# Altium PCB filter-6.PcbDoc
Units mil, origin at the board's own origin, x right, y up, seen from the top; angles counter-clockwise.
Board outline 1975 x 1380 mil, 2 copper layers (Top Layer, Bottom Layer); 5 components, 3 nets, 10 pads, 0 vias.
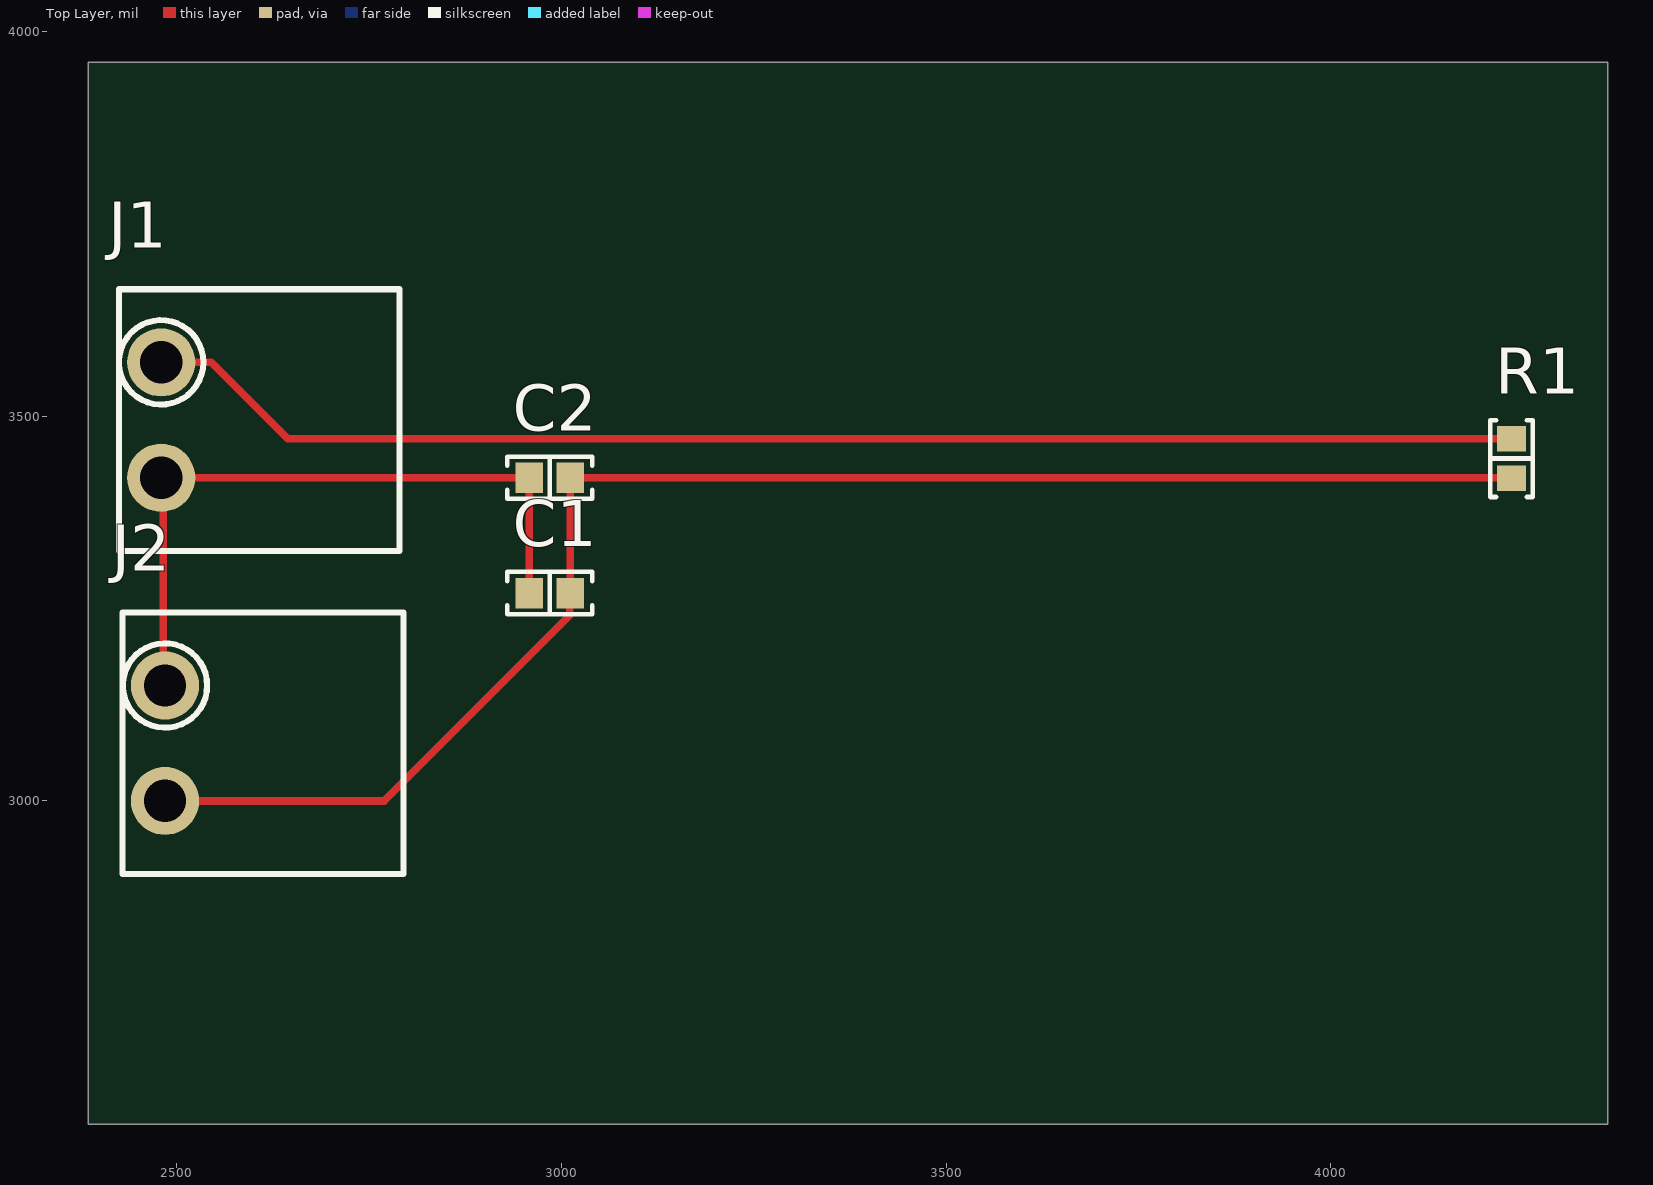
[diagram p0: Top Layer view]
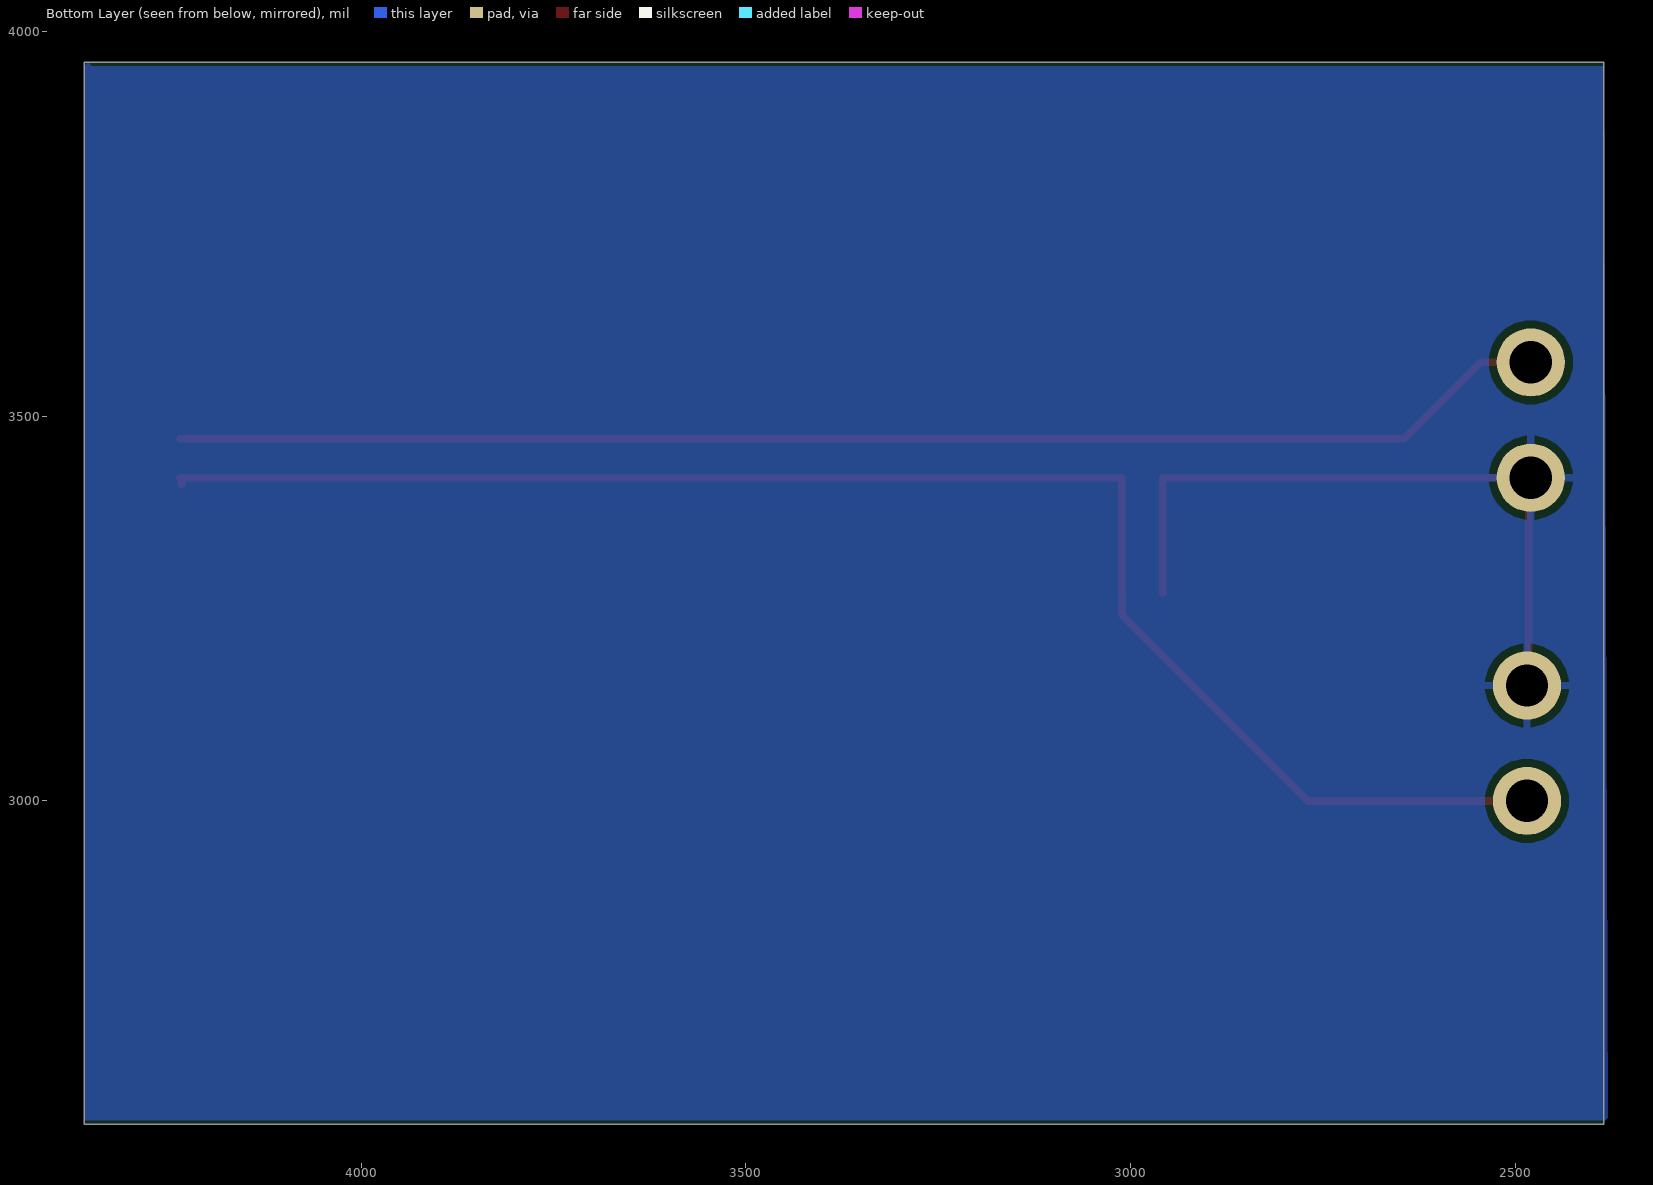
[diagram p1: Bottom Layer view, seen from below]
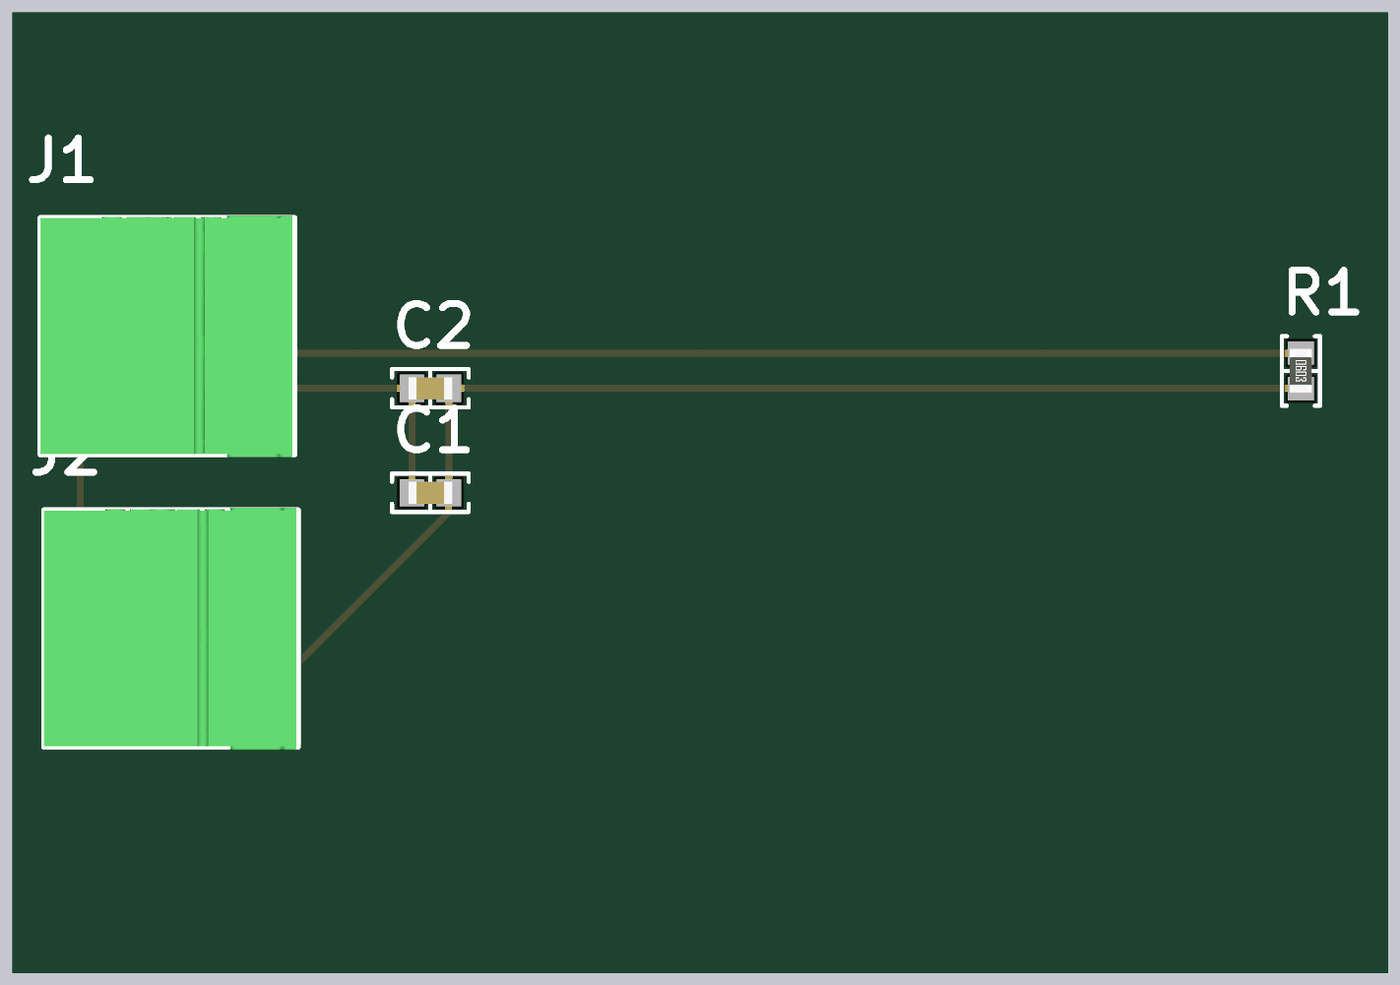
[diagram p2: 3D render of the assembled board from above, using the file's embedded part models]

## Layer stack, top to bottom
Top Solder: solder mask 0.4, Solder Resist, Dk 3.5
Top Layer: signal copper 1.4
Dielectric 1: dielectric 12.6, FR-4, Dk 4.8
Bottom Layer: signal copper 1.4
Bottom Solder: solder mask 0.4, Solder Resist, Dk 3.5

## Board outline
2385,2580 4360,2580 4360,3960 2385,3960

## Design rules (kind name [scope] priority, off if disabled: settings)
Clearance [All] p1: gap=10 ignorepadtopadclearanceinfootprint=FALSE except(0: Arc-Hole Track-Hole SMDPad-Hole THPad-Hole Via-Hole Fill-Hole Poly-Hole Region-Hole Text-Hole)
PolygonConnect [All] p1: connectstyle=Relief reliefconductorwidth=10 reliefentries=4 polygonreliefangle="90 Angle" airgapwidth=10
RoutingVias [All] p1: holewidth=28 width=50 viastyle="Through Hole" minholewidth=28 minwidth=50 maxholewidth=28 maxwidth=50
SolderMaskExpansion [All] p1: expansion=4 istentingtop=FALSE
Width [All] p1: maxlimit=10 minlimit=10 preferedwidth=10
30 further rules are at their usual default settings.

## Components (designator, comment, footprint, x,y, rotation, side; value= is the part's Value field where it differs from the comment)
C1 "2700 pF" "CAP 0603_1608" 2985,3270 r180 top (schematic designator C?)
C2 "2700 pF" "CAP 0603_1608" 2985,3420 r0 top (schematic designator C3)
J1 "OQ0232510000G" "FCI 06-381-2PIN" 2610,3495 r270 top
J2 "OQ0232510000G" "FCI 06-381-2PIN" 2615,3075 r270 top
R1 "10 kOhms" "RES 0603_1608" 4235,3445 r270 top

## Footprints (in the part's own frame and the unit in brackets; to place one, negate y for a bottom-side part, rotate by r counter-clockwise, add the part's x,y. Pads: shape width x height; smd on the part's side, far side on the other; paste and mask are expansions set on the pad)
"CAP 0603_1608" [mm] "Chip Capacitor, 2-Leads, Body 1.60x0.80mm, IPC Medium Density"
  rect 0.9x1 smd: 1(-0.675,0) 2(0.675,0)
  silkscreen extent -1.4,-0.7 1.4,0.7, body extent -0.8,-0.41 0.8,0.41, height 0.82
"FCI 06-381-2PIN" [mm] "FCI Pluggable Terminal Block"
  round 2.25 hole 1.4: 1(-1.905,-3.302) 2(1.905,-3.302)
  silkscreen extent -4.32,-4.7 4.32,4.57, body extent -4.4,-4.7 4.4,4.5, height 7.6
"RES 0603_1608" [mm] "Chip Resistor, 2-Leads, Body 1.60x0.80mm, IPC Medium Density"
  rect 0.85x0.95 smd: 1(-0.65,0) 2(0.65,0)
  silkscreen extent -1.27,-0.7 1.27,0.7, body extent -0.8,-0.4 0.8,0.4, height 0.45

## Part data
C1 C2: library part C0603C272F3GAC7867, "CAP CER 2700PF 25V NP0 0603", Device Package="0603 (1608 Metric)", Manufacturer=KEMET, Operating Temperature="-55°C ~ 125°C", Supplier Part Number 1=399-17403-1-ND, Temperature Coefficient="C0G, NP0", Tolerance=±1%, Voltage - Rated=25V, Applications="General Purpose", Capacitance="2700 pF", ComponentLink1Description=Datasheet, ComponentLink1URL=https://api.kemet.com/component-edge/download/datasheet/C0603C272F3GACTU.pdf, ComponentLink2Description="DigiKey Link", ComponentLink2URL=https://www.digikey.com/en/products/detail/kemet/C0603C272F3GAC7867/2200413, Features="Low ESL", lastupdated="03/09/2023 19:08:49", Lifecycle Status=Active, Minimum Order=1, Mounting Type="Surface Mount, MLCC", Package / Case="0603 (1608 Metric)", Packaging=TapeAndReel, Part Number=C0603C272F3GAC7867, Part Status=Active, PartId=2138, price=0.40, Series="SMD Comm C0G", Size / Dimension="0.063\" L x 0.031\" W (1.60mm x 0.80mm)", Supplier 1=DigiKey, Thickness (Max)="0.034\" (0.87mm)"
J1 J2: "TERM BLOCK HDR 2POS 90DEG 3.81MM", Color=Green, Current - UL=10A, Manufacturer="Amphenol Anytek", Operating Temperature="-40°C ~ 115°C", Supplier Part Number 1=609-3819-ND, Voltage - UL=300V, ComponentLink1Description=Datasheet, ComponentLink1URL=http://portal.fciconnect.com/Comergent//fci/drawing/oqxx32x100j0g.pdf, ComponentLink2Description="DigiKey Link", ComponentLink2URL=//digikey.com/product-detail/en/amphenol-anytek/OQ0232510000G/609-3819-ND/2261255, Contact Mating Finish=Tin, Header Orientation="90°, Right Angle", lastupdated="16/12/2019 19:14:30", Lifecycle Status=0, Minimum Order=1, Mounting Type="Through Hole", Number of Levels=1, Number of Positions=2, Packaging=Bulk, Part Number=OQ0232510000G, Part Status=Active, Pitch="0.150\" (3.81mm)", Positions Per Level=2, price=0.49, Series=06-381, Supplier 1=DigiKey, Termination Style=Solder, Type="Header, Male Pins, Shrouded (4 Side)"
R1: library part RNCS0603BKE10K0, "RES 10K OHM 0.1% 1/16W 0603", Device Package="0603 (1608 Metric)", Manufacturer="Stackpole Electronics Inc", Operating Temperature="-55°C ~ 155°C", Power (Watts)="0.063W, 1/16W", Ratings=AEC-Q200, Supplier Device Package=0603, Supplier Part Number 1=RNCS0603BKE10K0CT-ND, Temperature Coefficient=±25ppm/°C, Tolerance=±0.1%, ComponentLink1Description=Datasheet, ComponentLink1URL=https://www.seielect.com/catalog/sei-rncs_rnch.pdf, ComponentLink2Description="DigiKey Link", ComponentLink2URL=https://www.digikey.com/en/products/detail/stackpole-electronics-inc/RNCS0603BKE10K0/1708836, Composition="Thin Film", Features="Anti-Corrosive, Automotive AEC-Q200, Moisture Resistant", Height - Seated (Max)="0.022\" (0.55mm)", lastupdated="03/09/2023 19:33:51", Lifecycle Status=Active, Minimum Order=1, Number of Terminations=2, Package / Case="0603 (1608 Metric)", Packaging=TapeAndReel, Part Number=RNCS0603BKE10K0, Part Status=Active, PartId=4838, price=0.06, Resistance="10 kOhms", Series=RNCS, Size / Dimension="0.061\" L x 0.031\" W (1.55mm x 0.80mm)", Supplier 1=DigiKey

## Nets (pads, with @x,y where several pads share a name; then routed paths per layer and width w, separated by ;. In a path a pad name is that pad's centre, name@x,y a point inside that pad or via, vN(x,y) a via of type N, cw(c..) or ccw(c..) an arc to the next point about the centre after c; other vN are vias at no path point)
GND: C1.2 C2.1 J1.2 J2.1 | length 900.5
  Top Layer w10: J2.1 2482.5,3152.5 2482.5,3417.5 J1.2 C2.1 C1.2
NetC3_2: C1.1 C2.2 J2.2 R1.2 | length 2036.2
  Top Layer w10: J2.2 2770,3000 3011.17,3241.17 3011.17,3269.6 C1.1 C2.2 4234.41,3420 R1.2 ; R1.2@4233.65,3411.35 R1.2@4233.65,3418.79
NetJ1_1: J1.1 R1.1 | length 1796.2
  Top Layer w10: J1.1 2545,3570 2644.41,3470.59 R1.1

## Polygon pours and split planes (outlines as drawn)
GND on Bottom Layer "GND_L02_P000" (solid, pour order 0): 2380,2585 4360,2585 4360,3955 4355,3960 4350,3955 2380,3955 2385,3960

## Silkscreen, mask and mechanical layers (free items; w line width, h text height)
Mechanical 1:
  the board outline again, w10